# Altium PCB BEAGLEPLAYV020_220915.brd.PcbDoc (part 3 of 12)
Units mil, origin at the board's own origin, x right, y up, seen from the top; angles counter-clockwise.
Board outline 3149.7 x 3149.7 mil, 8 copper layers (TOP, LYR2_GND, LYR3, LAY4_PWR1, LAY5_PWR2, LAY6, LYR7_GND, BOTTOM), stack 60.84 mil thick; 782 components, 546 nets, 2864 pads, 2056 vias.
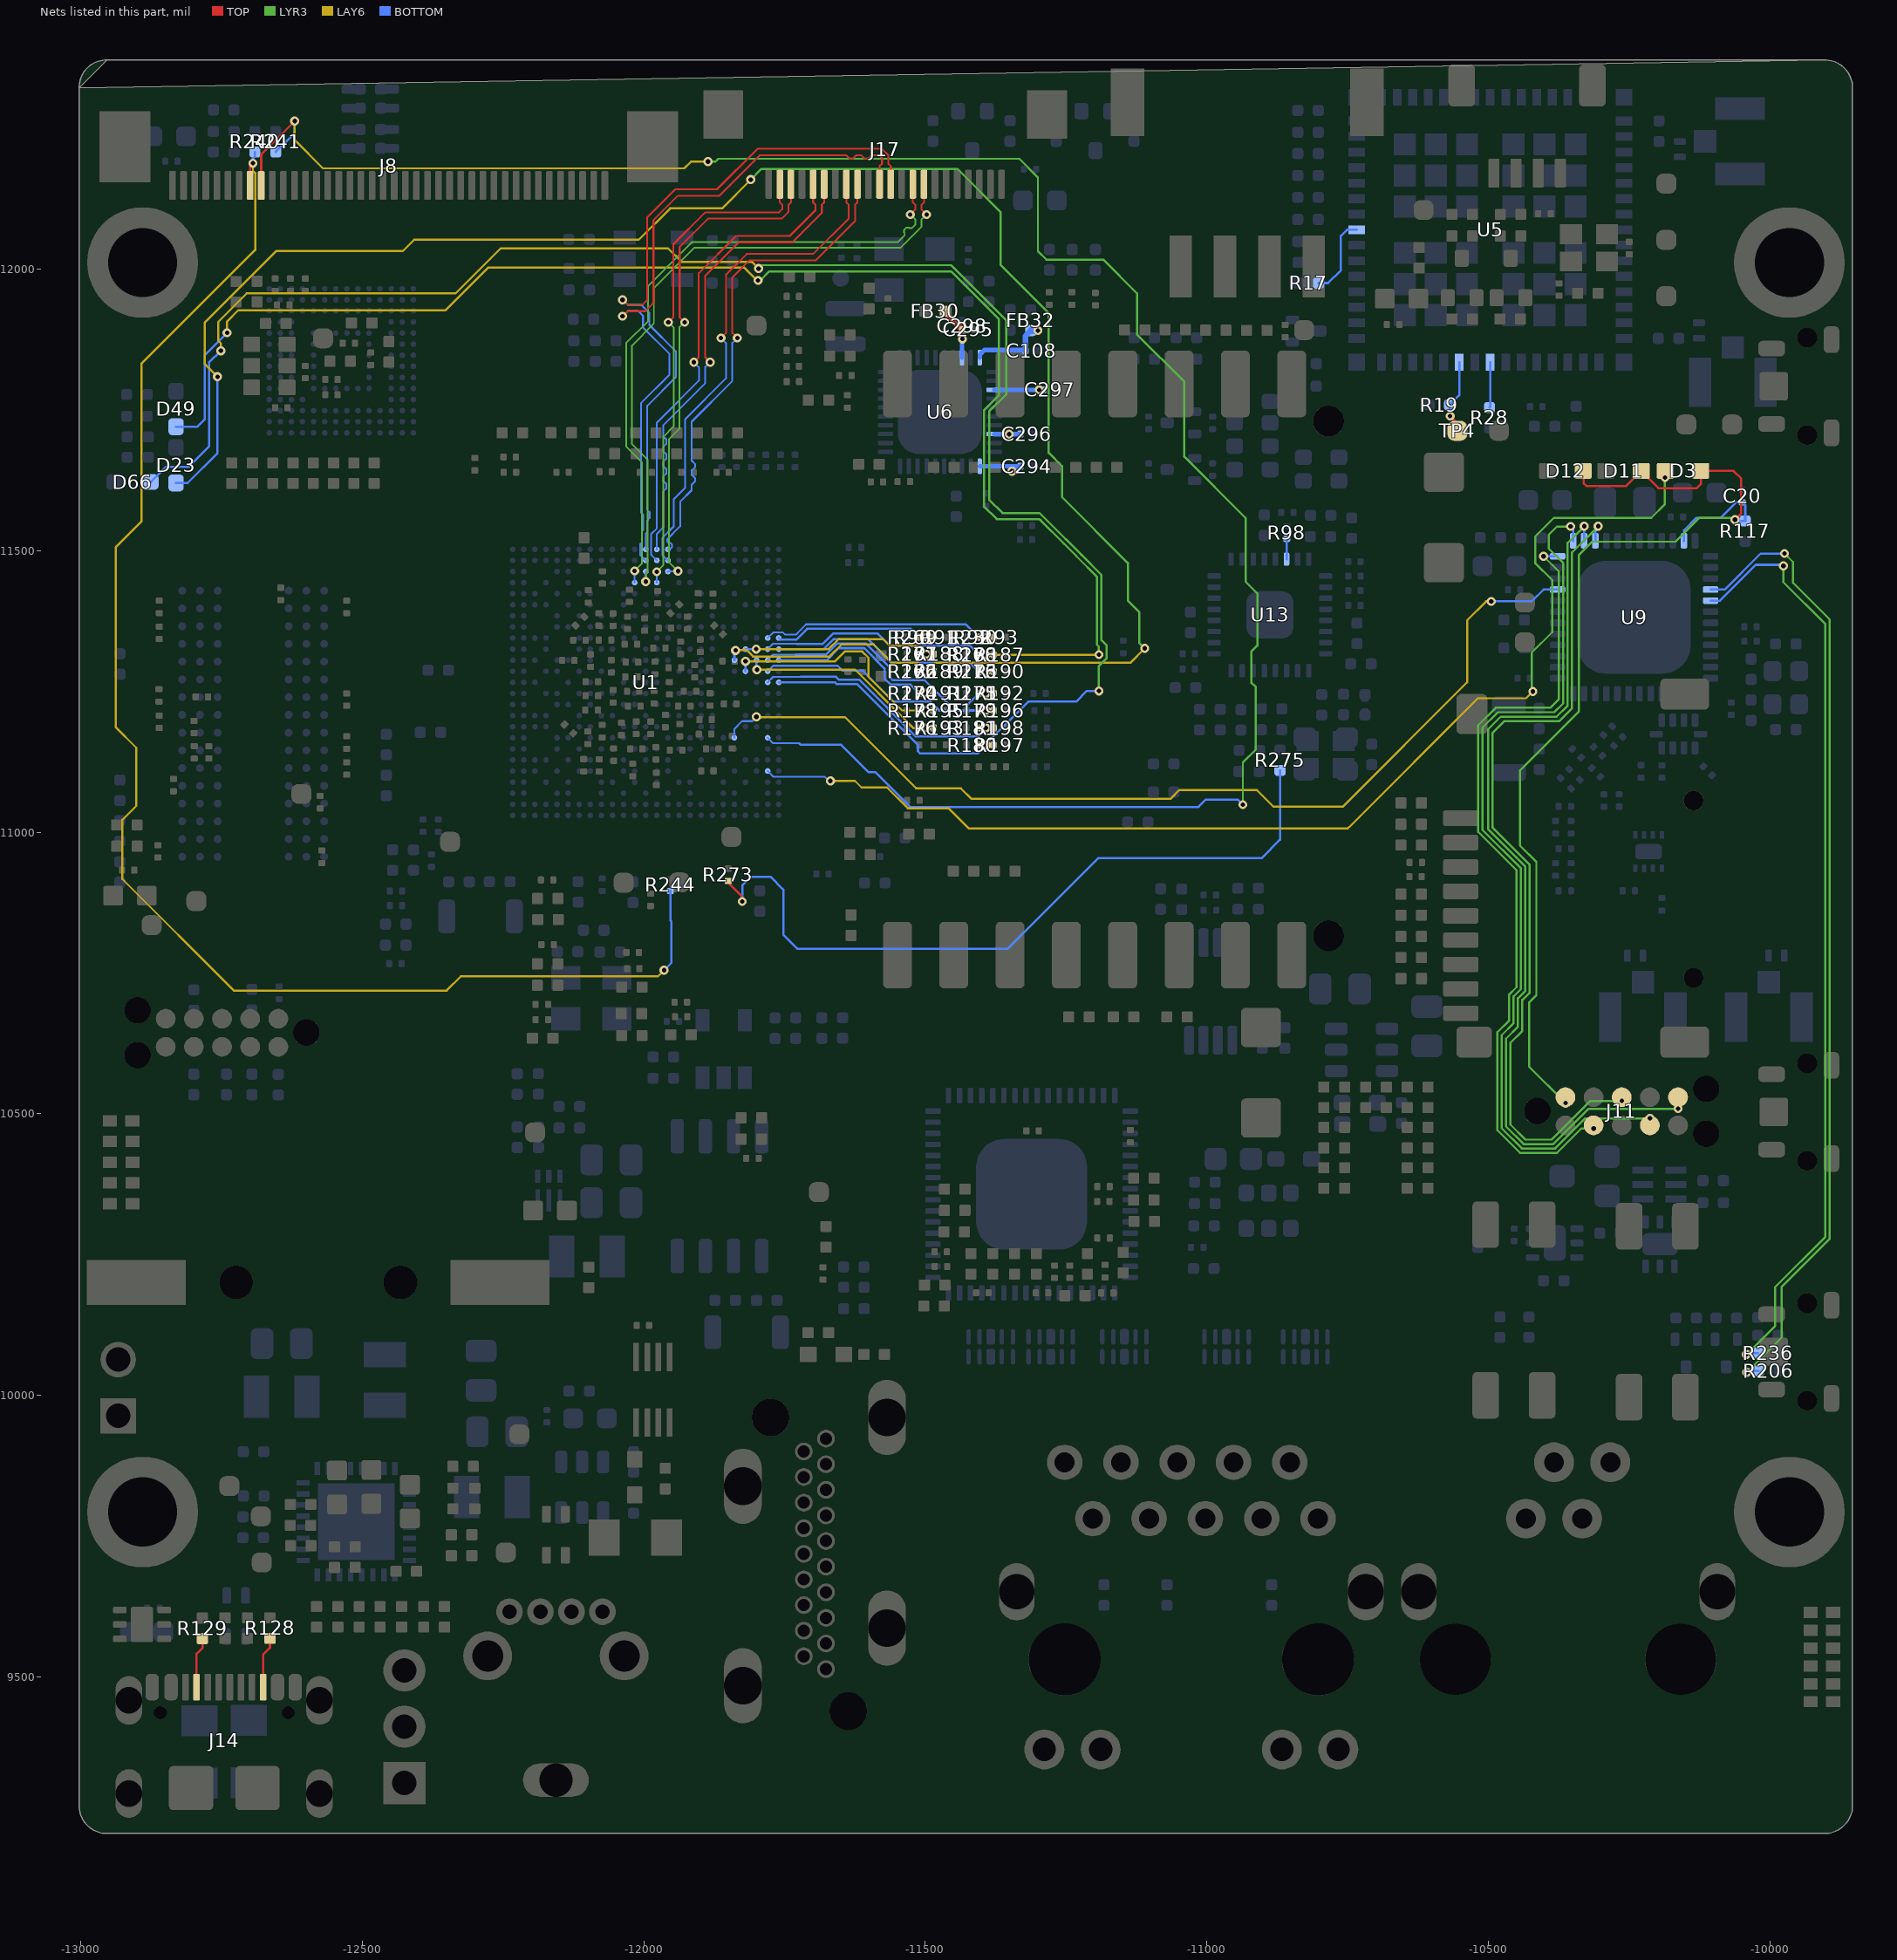
[diagram p9: the nets of this part, all layers, seen from the top]

## Footprints (in the part's own frame and the unit in brackets; to place one, negate y for a bottom-side part, rotate by r counter-clockwise, add the part's x,y. Pads: shape width x height; smd on the part's side, far side on the other; paste and mask are expansions set on the pad) (continued)
HDMI19P_1D155_23_1X7_7X16_4MM [mil] "HDMI19P_1D155_23_1X7_7X16_4MM"
  round 31.5 hole 21.65: 1(19.69,-45.2) 2(-19.69,-22.44) 3(19.69,0.28) 4(-19.69,23.03) 5(19.69,45.75) 6(-19.69,68.5) 7(19.69,91.22) 8(-19.69,113.98) 9(19.69,136.69) 10(-19.69,159.45) 11(19.69,182.17) 12(-19.69,204.92) 13(19.69,227.64) 14(-19.69,250.39) 15(19.69,273.11) 16(-19.69,295.87) 17(19.69,318.58) 18(-19.69,341.34) 19(19.69,364.06)
  oval 66.93x133.86 hole 66.93 slot 133.86 at 90 deg: 20(-127.95,-74.72) 21(-127.95,279.61) 22(127.95,27.64) 23(127.95,401.65)
  round 66.93 hole 66.93 unplated: ""(-78.74,401.65) ""(59.06,-120)
  Multi-Layer keep-out region: 102.29,-120 100.82,-108.81 96.5,-98.38 89.63,-89.43 80.67,-82.56 70.25,-78.24 59.06,-76.77 47.87,-78.24 37.44,-82.56 37.44,-82.56 28.48,-89.43 21.61,-98.38 17.29,-108.81 15.82,-120 17.29,-131.19 21.61,-141.62 28.48,-150.57 37.44,-157.44 37.44,-157.44 47.87,-161.76 59.06,-163.23 70.25,-161.76 80.67,-157.44 89.63,-150.57 96.5,-141.62 100.82,-131.19 102.29,-120
  Multi-Layer keep-out region: -35.5,401.65 -36.97,412.84 -41.29,423.27 -48.16,432.23 -57.12,439.1 -67.55,443.42 -78.74,444.89 -89.93,443.42 -100.36,439.1 -100.36,439.1 -109.32,432.23 -116.19,423.27 -120.51,412.84 -121.98,401.65 -120.51,390.46 -116.19,380.03 -109.32,371.08 -100.36,364.21 -100.36,364.21 -89.93,359.89 -78.74,358.41 -67.55,359.89 -57.12,364.21 -48.16,371.08 -41.29,380.03 -36.97,390.46 -35.5,401.65
  silkscreen extent -152,-455 152,455
HEADER2P_2D54_DIP [mil] "HEADER2P_2D54_DIP"
  rect 62.99x62.99 / inner round 62.99 / far side rect 62.99x62.99 hole 43.31: 1(0,50)
  round 62.99 hole 43.31: 2(0,-50)
  silkscreen extent -50,-100 50,100, body extent -50,-100 50,100, height 150
HEADER3P_2D54_DIP [mil] "HEADER3P_2D54_DIP"
  rect 75x75 hole 43.31: 1(0,100)
  round 75 hole 43.31: 2(0,0) 3(0,-100)
  silkscreen extent -50,-150 50,150, body extent -50,-150 50,150, height 150
JST4P_1D0_6_5X4_35X3_1MM [mil] "JST4P_1D0_6_5X4_35X3_1MM"
  rrect20% 19.68x51.18 smd: 1(-61.56,100) 2(-22.19,100) 3(17.19,100) 4(56.56,100)
  rrect33% 47.24x74.8 smd: 5(-118.64,-55.51) 6(113.64,-55.51)
  silkscreen extent -130,-85 125,145, body extent -128,-85 128,85, height 150
JST4P_SMD_2_0_90D [mil] "JST4P_SMD_2_0_90D"
  rect 40x110 smd: 1(-118.11,-182.5) 2(-39.37,-182.5) 3(39.37,-182.5) 4(118.11,-182.5)
  rect 60x120 smd: 5(212.6,108.84) 6(-212.6,108.84)
  silkscreen extent -240,-228 240,180
L4P_2D54_9_2X6X5MM [mil] "L4P_2D54_9_2X6X5MM"
  rrect33% 82.68x47.24 smd: 1(-151.57,50) 2(-151.57,-50) 3(151.57,-50) 4(151.57,50)
  silkscreen extent -200,-118 181,135, body extent -180,-120 180,120, height 150
L0201#1 [mil] "L0201"
  rrect50% 12.5x11 smd: 1(0.01,-11) 2(0.01,11.01)
  silkscreen extent -10,-20 10,20, body extent -15,-10 15,10, height 150
L0201#2 [mil] "L0201"
  rrect50% 12.5x11 smd: 1(-0.01,11) 2(-0.01,-11.01)
  silkscreen extent -10,-20 10,20, body extent -15,-10 15,10, height 150
L0201#3 [mil] "L0201"
  rrect50% 11x12.5 smd: 1(11,0) 2(-11,0)
  silkscreen extent -20,-10 20,10, body extent -15,-10 15,10, height 150
L0402#1 [mil] "L0402"
  rrect20% 19.68x19.68 smd: 1(-18.21,0) 2(18.21,0)
  silkscreen extent -33,-16 33,16, body extent -30,-15 30,15, height 150
L0402#2 [mil] "L0402"
  rrect50% 19.68x19.68 smd: 1(18.21,0) 2(-18.21,0)
  silkscreen extent -33,-16 33,16, body extent -30,-15 30,15, height 150
L0402#3 [mil] "L0402"
  rrect50% 19.68x19.68 smd: 1(-18.21,0) 2(18.21,0)
  silkscreen extent -33,-16 33,16, body extent -30,-15 30,15, height 150
L0805 [mil] "L0805"
  rrect50% 40x55 smd: 1(-35,0) 2(35,0)
  silkscreen extent -65,-35 65,35, body extent -65,-35 65,35, height 150
L1008#1 [mil] "L1008"
  rect 45x75 smd: 1(-45,0) 2(45,0)
  silkscreen extent -80,-50 80,50, body extent -80,-50 80,50, height 150
L1008#2 [mil] "L1008"
  rect 45x75 smd: 1(45,0) 2(-45,0)
  silkscreen extent -80,-50 80,50, body extent -80,-50 80,50, height 150
L2012#1 [mil] "L2012"
  rrect25% 29.52x15.74 smd: 1(-36.42,16.73) 2(36.42,16.73) 3(36.42,-16.73) 4(-36.42,-16.73)
  silkscreen extent -40,-24 39,45, body extent -40,-25 40,25, height 150
L2012#2 [mil] "L2012"
  rrect50% 29.52x15.74 smd: 1(36.42,-16.73) 2(-36.42,-16.73) 3(-36.42,16.73) 4(36.42,16.73)
  silkscreen extent -39,-45 40,24, body extent -40,-25 40,25, height 150
L2012#3 [mil] "L2012"
  rrect50% 29.52x15.74 smd: 1(-36.42,16.73) 2(36.42,16.73) 3(36.42,-16.73) 4(-36.42,-16.73)
  silkscreen extent -40,-24 39,45, body extent -40,-25 40,25, height 150
L2016 [mil] "L2016"
  rrect50% 27.56x70.86 smd: 1(31.5,0) 2(-31.5,0)
  silkscreen extent -50,-40 50,40
LED0402 [mil] "LED0402"
  rect 25x20 smd: 1(-20,0) 2(20,0)
  TOP keep-out region: -4,-12 -4,12 4,12 4,-12
  silkscreen extent -65,-15 40,15, body extent -40,-15 40,15, height 150
MICRO_SD_ST_TF_003A_16_1X14_5MM [mil] "MICRO_SD_ST_TF_003A_16_1X14_5MM"
  rrect29% 62.98x27.56 smd: 1(-295,91.08) 2(-295,47.78) 3(-295,4.47) 4(-295,-38.84) 5(-295,-82.15) 6(-295,-125.45) 7(-295,-168.76) 8(-295,-212.07) 9(-295,-255.37)
  rrect29% 62.98x55.12 smd: 10(-271.38,-306.56)
  rrect29% 86.6x55.12 smd: 11(102.64,-306.56) 12(102.64,311.56)
  rrect29% 55.12x70.86 smd: 13(-275.31,276.12)
  round 35.43 hole 35.43 unplated: ""(118.39,-192.38) ""(118.39,122.58)
  Multi-Layer keep-out region: 146.34,-192.38 145.39,-185.15 142.59,-178.41 138.15,-172.62 132.36,-168.17 125.62,-165.38 118.39,-164.43 111.15,-165.38 104.41,-168.17 104.41,-168.17 98.62,-172.62 94.18,-178.41 91.39,-185.15 90.43,-192.38 91.39,-199.62 94.18,-206.36 98.62,-212.15 104.41,-216.59 104.41,-216.59 111.15,-219.38 118.39,-220.34 125.62,-219.38 132.36,-216.59 138.15,-212.15 142.59,-206.36 145.39,-199.62 146.34,-192.38
  Multi-Layer keep-out region: 146.34,122.58 145.39,129.81 142.59,136.56 138.15,142.34 132.36,146.79 125.62,149.58 118.39,150.53 111.15,149.58 104.41,146.79 104.41,146.79 98.62,142.34 94.18,136.56 91.39,129.81 90.43,122.58 91.39,115.34 94.18,108.6 98.62,102.81 104.41,98.37 104.41,98.37 111.15,95.58 118.39,94.63 125.62,95.58 132.36,98.37 138.15,102.81 142.59,108.6 145.39,115.34 146.34,122.58
  silkscreen extent -295,-295 398,292
MIKROBUS16_2D54_25_4X22_88X8_5MM [mil] "MIKROBUS16_2D54_25_4X22_88X8_5MM"
  rrect31% 51.18x118.1 smd: 1(-315,-507.09) 2(-215,-507.09) 3(-115,-507.09) 4(-15,-507.09) 5(85,-507.09) 6(185,-507.09) 7(285,-507.09) 8(385,-507.09) 9(385,507.09) 10(285,507.09) 11(185,507.09) 12(85,507.09) 13(-15,507.09) 14(-115,507.09) 15(-215,507.09) 16(-315,507.09)
  round 55.12 hole 55.12 unplated: ""(-380.35,472.44) ""(-380.35,-440.94)
  Multi-Layer keep-out region: -415.52,-440.94 -414.32,-450.05 -410.81,-458.53 -405.22,-465.81 -397.94,-471.4 -389.46,-474.91 -380.35,-476.11 -371.25,-474.91 -362.77,-471.4 -362.77,-471.4 -355.49,-465.81 -349.9,-458.53 -346.39,-450.05 -345.19,-440.94 -346.39,-431.84 -349.9,-423.36 -355.49,-416.08 -362.77,-410.49 -362.77,-410.49 -371.25,-406.98 -380.35,-405.78 -389.46,-406.98 -397.94,-410.49 -405.22,-416.08 -410.81,-423.36 -414.32,-431.84 -415.52,-440.94
  Multi-Layer keep-out region: -415.52,472.44 -414.32,463.34 -410.81,454.86 -405.22,447.57 -397.94,441.99 -389.46,438.47 -380.35,437.27 -371.25,438.47 -362.77,441.99 -362.77,441.99 -355.49,447.57 -349.9,454.86 -346.39,463.34 -345.19,472.44 -346.39,481.54 -349.9,490.02 -355.49,497.31 -362.77,502.9 -362.77,502.9 -371.25,506.41 -380.35,507.61 -389.46,506.41 -397.94,502.9 -405.22,497.31 -410.81,490.02 -414.32,481.54 -415.52,472.44
  silkscreen extent -466,-500 435,500, body extent -485,-500 485,500, height 150
PTH_3_125MM_5 [mm] "PTH_3_125MM_5"
  round 5 hole 3.125: 1(0,0)
QFN32_5X5MM_TPS65219 [mil] "QFN32_5X5MM_TPS65219"
  rect 23.62x9.84 smd: 1(-94.49,68.9) 2(-94.49,49.21) 3(-94.49,29.53) 4(-94.49,9.84) 5(-94.49,-9.84) 6(-94.49,-29.53) 7(-94.49,-49.21) 8(-94.49,-68.9) 17(94.49,-68.9) 18(94.49,-49.21) 19(94.49,-29.53) 20(94.49,-9.84) 21(94.49,9.84) 22(94.49,29.53) 23(94.49,49.21) 24(94.49,68.9)
  rect 9.84x23.62 smd: 9(-68.9,-94.49) 10(-49.21,-94.49) 11(-29.53,-94.49) 12(-9.84,-94.49) 13(9.84,-94.49) 14(29.53,-94.49) 15(49.21,-94.49) 16(68.9,-94.49) 25(68.9,94.49) 26(49.21,94.49) 27(29.53,94.49) 28(9.84,94.49) 29(-9.84,94.49) 30(-29.53,94.49) 31(-49.21,94.49) 32(-68.9,94.49)
  rect 135.83x135.83 smd: 33(0,0)
  silkscreen extent -125,-107 107,125, body extent -100,-100 100,100, height 150
QFN40_0D4_5X5MM [mm] "QFN40_0D4_5X5MM"
  rrect50% 0.7x0.2 smd: 1(-2.45,1.8) 2(-2.45,1.4) 3(-2.45,1) 4(-2.45,0.6) 5(-2.45,0.2) 6(-2.45,-0.2) 7(-2.45,-0.6) 8(-2.45,-1) 9(-2.45,-1.4) 10(-2.45,-1.8) 21(2.45,-1.8) 22(2.45,-1.4) 23(2.45,-1) 24(2.45,-0.6) 25(2.45,-0.2) 26(2.45,0.2) 27(2.45,0.6) 28(2.45,1) 29(2.45,1.4) 30(2.45,1.8)
  rrect50% 0.2x0.7 smd: 11(-1.8,-2.45) 12(-1.4,-2.45) 13(-1,-2.45) 14(-0.6,-2.45) 15(-0.2,-2.45) 16(0.2,-2.45) 17(0.6,-2.45) 18(1,-2.45) 19(1.4,-2.45) 20(1.8,-2.45) 31(1.8,2.45) 32(1.4,2.45) 33(1,2.45) 34(0.6,2.45) 35(0.2,2.45) 36(-0.2,2.45) 37(-0.6,2.45) 38(-1,2.45) 39(-1.4,2.45) 40(-1.8,2.45)
  rrect50% 3.8x3.8 smd: 41(0,0)
  silkscreen extent -2.92,-2.5 2.5,2.92, body extent -2.54,-2.54 2.54,2.54, height 3.81
QFN48_0D5_7X7MM [mil] "QFN48_0D5_7X7MM"
  rrect50% 27.56x11.8 smd: 1(135.83,-108.27) 2(135.83,-88.58) 3(135.83,-68.9) 4(135.83,-49.21) 5(135.83,-29.53) 6(135.83,-9.84) 7(135.83,9.84) 8(135.83,29.53) 9(135.83,49.21) 10(135.83,68.9) 11(135.83,88.58) 12(135.83,108.27) 25(-135.83,108.27) 26(-135.83,88.58) 27(-135.83,68.9) 28(-135.83,49.21) 29(-135.83,29.53) 30(-135.83,9.84) 31(-135.83,-9.84) 32(-135.83,-29.53) 33(-135.83,-49.21) 34(-135.83,-68.9) 35(-135.83,-88.58) 36(-135.83,-108.27)
  rrect50% 11.8x27.56 smd: 13(108.27,135.83) 14(88.58,135.83) 15(68.9,135.83) 16(49.21,135.83) 17(29.53,135.83) 18(9.84,135.83) 19(-9.84,135.83) 20(-29.53,135.83) 21(-49.21,135.83) 22(-68.9,135.83) 23(-88.58,135.83) 24(-108.27,135.83) 37(-108.27,-135.83) 38(-88.58,-135.83) 39(-68.9,-135.83) 40(-49.21,-135.83) 41(-29.53,-135.83) 42(-9.84,-135.83) 43(9.84,-135.83) 44(29.53,-135.83) 45(49.21,-135.83) 46(68.9,-135.83) 47(88.58,-135.83) 48(108.27,-135.83)
  rrect50% 200.78x200.78 smd: 49(0,0)
  silkscreen extent -138,-155 155,138
QFN64_0D5_9X9MM [mil] "QFN64_0D5_9X9MM"
  rrect50% 27.56x9.84 smd: 1(-175.2,147.64) 2(-175.2,127.95) 3(-175.2,108.27) 4(-175.2,88.58) 5(-175.2,68.9) 6(-175.2,49.21) 7(-175.2,29.53) 8(-175.2,9.84) 9(-175.2,-9.84) 10(-175.2,-29.53) 11(-175.2,-49.21) 12(-175.2,-68.9) 13(-175.2,-88.58) 14(-175.2,-108.27) 15(-175.2,-127.95) 16(-175.2,-147.64) 33(175.2,-147.64) 34(175.2,-127.95) 35(175.2,-108.27) 36(175.2,-88.58) 37(175.2,-68.9) 38(175.2,-49.21) 39(175.2,-29.53) 40(175.2,-9.84) 41(175.2,9.84) 42(175.2,29.53) 43(175.2,49.21) 44(175.2,68.9) 45(175.2,88.58) 46(175.2,108.27) 47(175.2,127.95) 48(175.2,147.64)
  rrect50% 9.84x27.56 smd: 17(-147.64,-175.2) 18(-127.95,-175.2) 19(-108.27,-175.2) 20(-88.58,-175.2) 21(-68.9,-175.2) 22(-49.21,-175.2) 23(-29.53,-175.2) 24(-9.84,-175.2) 25(9.84,-175.2) 26(29.53,-175.2) 27(49.21,-175.2) 28(68.9,-175.2) 29(88.58,-175.2) 30(108.27,-175.2) 31(127.95,-175.2) 32(147.64,-175.2) 49(147.64,175.2) 50(127.95,175.2) 51(108.27,175.2) 52(88.58,175.2) 53(68.9,175.2) 54(49.21,175.2) 55(29.53,175.2) 56(9.84,175.2) 57(-9.84,175.2) 58(-29.53,175.2) 59(-49.21,175.2) 60(-68.9,175.2) 61(-88.58,175.2) 62(-108.27,175.2) 63(-127.95,175.2) 64(-147.64,175.2)
  rrect50% 196.84x196.84 smd: 65(0,0)
  silkscreen extent -195,-177 177,195, body extent -180,-180 180,180, height 150
R0201#1 [mil] "R0201"
  rrect36% 11x12.5 smd: 1(-11,0) 2(11,0)
  silkscreen extent -20,-10 20,10, body extent -15,-10 15,10, height 150
R0201#2 [mil] "R0201"
  rrect50% 11x12.5 smd: 1(11,0) 2(-11,0)
  silkscreen extent -20,-10 20,10, body extent -15,-10 15,10, height 150
R0201#3 [mil] "R0201"
  rrect50% 11x12.5 smd: 1(-11,0) 2(11,0)
  silkscreen extent -20,-10 20,10, body extent -15,-10 15,10, height 150
R0402#1 [mil] "R0402"
  rrect50% 19.68x19.68 smd: 1(18.21,0) 2(-18.21,0)
  silkscreen extent -33,-16 33,16
R0402#2 [mil] "R0402"
  rrect20% 19.68x19.68 smd: 1(-18.21,0) 2(18.21,0)
  silkscreen extent -33,-16 33,16, body extent -30,-15 30,15, height 150
R0402#3 [mil] "R0402"
  rrect50% 19.68x19.68 smd: 1(-18.21,0) 2(18.21,0)
  silkscreen extent -33,-16 33,16, body extent -30,-15 30,15, height 150
R1206 [mil] "R1206"
  rect 55x64 smd: 1(55.5,0) 2(-55.5,0)
  silkscreen extent -85,-40 85,40, body extent -85,-40 85,40, height 150
RJ11_6P4C_1D27_21_15X13_8X13_3 [mm] "RJ11_6P4C_1D27_21_15X13_8X13_3"
  round 1.8 hole 0.9: 2(-1.905,6.575) 3(-0.635,9.115) 4(0.635,6.575) 5(1.905,9.115)
  oval 1.6x2.6 hole 1.6 slot 2.6 at 90 deg: S1(-6.73,3.275) S2(6.73,3.275)
  round 3.2 hole 3.2 unplated: ""(-5.08,0.225) ""(5.08,0.225)
  Multi-Layer keep-out region: -3.221,0.225 -3.257,0.588 -3.363,0.936 -3.534,1.258 -3.766,1.539 -4.047,1.771 -4.369,1.942 -4.717,2.048 -5.08,2.084 -5.443,2.048 -5.791,1.942 -6.005,1.828 -6.005,1.828 -6.113,1.771 -6.394,1.539 -6.626,1.258 -6.797,0.936 -6.903,0.588 -6.939,0.225 -6.903,-0.138 -6.797,-0.486 -6.626,-0.808 -6.394,-1.089 -6.113,-1.321 -6.005,-1.378 -6.005,-1.378 -5.791,-1.492 -5.443,-1.598 -5.08,-1.634 -4.717,-1.598 -4.369,-1.492 -4.047,-1.321 -3.766,-1.089 -3.534,-0.808 -3.363,-0.486 -3.257,-0.138 -3.221,0.225
  Multi-Layer keep-out region: 6.939,0.225 6.903,0.588 6.797,0.936 6.626,1.258 6.394,1.539 6.113,1.771 5.791,1.942 5.443,2.048 5.08,2.084 4.717,2.048 4.369,1.942 4.155,1.828 4.155,1.828 4.047,1.771 3.766,1.539 3.534,1.258 3.363,0.936 3.257,0.588 3.221,0.225 3.257,-0.138 3.363,-0.486 3.534,-0.808 3.766,-1.089 4.047,-1.321 4.155,-1.378 4.155,-1.378 4.369,-1.492 4.717,-1.598 5.08,-1.634 5.443,-1.598 5.791,-1.492 6.113,-1.321 6.394,-1.089 6.626,-0.808 6.797,-0.486 6.903,-0.138 6.939,0.225
  silkscreen extent -7,-10.67 7,10.68, body extent -6.9,-10.58 6.9,10.58, height 3.81
RJ45_18P_21_23X15_93X13_3MM [mil] "RJ45_18P_21_23X15_93X13_3MM"
  round 62.99 hole 35.43: 1(-225,357.5) 2(-175,257.5) 3(-125,357.5) 4(-75,257.5) 5(-25,357.5) 6(25,257.5) 7(75,357.5) 8(125,257.5) 9(175,357.5) 10(225,257.5)
  round 70.87 hole 41.34: 11(-261.02,-152.34) 12(-161.02,-152.34) 13(161.02,-152.34) 14(261.02,-152.34)
  oval 62.99x102.36 hole 62.99 slot 102.36 at 90 deg: 15(-310.04,127.58) 16(310.04,127.58)
  round 127.95 hole 127.95 unplated: ""(-225,7.5) ""(225,7.5)
  Multi-Layer keep-out region: 300.53,7.5 299.08,22.24 294.78,36.41 287.8,49.46 278.41,60.91 266.96,70.3 253.91,77.28 239.74,81.58 225,83.03 210.26,81.58 196.09,77.28 187.39,72.63 187.39,72.63 183.04,70.3 171.59,60.91 162.2,49.46 155.22,36.41 150.92,22.24 149.47,7.5 150.92,-7.24 155.22,-21.41 162.2,-34.46 171.59,-45.91 183.04,-55.3 187.39,-57.63 187.39,-57.63 196.09,-62.28 210.26,-66.58 225,-68.03 239.74,-66.58 253.91,-62.28 266.96,-55.3 278.41,-45.91 287.8,-34.46 294.78,-21.41 299.08,-7.24 300.53,7.5
  Multi-Layer keep-out region: -150.31,7.5 -151.75,22.07 -156,36.08 -162.9,49 -172.19,60.31 -183.5,69.6 -196.42,76.5 -210.43,80.75 -225,82.19 -239.57,80.75 -253.58,76.5 -262.18,71.91 -262.18,71.91 -266.5,69.6 -277.81,60.31 -287.1,49 -294,36.08 -298.25,22.07 -299.69,7.5 -298.25,-7.07 -294,-21.08 -287.1,-34 -277.81,-45.31 -266.5,-54.6 -262.18,-56.91 -262.18,-56.91 -253.58,-61.5 -239.57,-65.75 -225,-67.19 -210.43,-65.75 -196.42,-61.5 -183.5,-54.6 -172.19,-45.31 -162.9,-34 -156,-21.08 -151.75,-7.07 -150.31,7.5
  silkscreen extent -314,-418 314,452
SMINI6-F3-B [mil] "SMINI6-F3-B"
  rect 12x37.4 smd: 1(-25.59,-29.53) 2(0,-29.53) 3(25.59,-29.53) 4(25.59,29.53) 5(0,29.53) 6(-25.59,29.53)
  silkscreen extent -55,-40 39,25, body extent -40,-25 40,25, height 150
SOD_523#1 [mil] "SOD_523"
  rrect14% 30x27.56 smd: 1(-31.5,0) 2(31.5,0)
  silkscreen extent -14,-16 14,16, body extent -25,-15 25,15, height 150
SOD_523#2 [mil] "SOD_523"
  rrect50% 30x27.56 smd: 1(31.5,0) 2(-31.5,0)
  silkscreen extent -14,-16 14,16
SOD_523#3 [mil] "SOD_523"
  rrect50% 30x27.56 smd: 1(-31.5,0) 2(31.5,0)
  silkscreen extent -14,-16 14,16, body extent -25,-15 25,15, height 150
SOIC8_1D27_4_9X3_9MM [mm] "SOIC8_1D27_4_9X3_9MM"
  rrect50% 0.6x1.55 smd: 1(-1.905,-2.7) 2(-0.635,-2.7) 3(0.635,-2.7) 4(1.905,-2.7) 5(1.905,2.7) 6(0.635,2.7) 7(-0.635,2.7) 8(-1.905,2.7)
  silkscreen extent -2.79,-2.29 2.45,1.95, body extent -2.41,-1.91 2.41,1.91, height 3.81
SON8P_150X150X50MM [mm] "SON8P_150X150X50MM"
  rrect50% 0.2x0.35 smd: 1(-0.59,-0.765) 2(-0.19,-0.765) 3(0.21,-0.765) 4(0.61,-0.765) 5(0.61,0.735) 6(0.21,0.735) 7(-0.19,0.735) 8(-0.59,0.735)
  rrect50% 1.2x0.7 smd: 9(0.01,-0.015)
  silkscreen extent -1.35,-0.89 0.91,0.43, body extent -0.91,-0.95 0.91,0.94, height 3.81
SOT23 [mil] "SOT23"
  rrect50% 40x45 smd: 1(35,42.5) 2(-35,42.5) 3(0,-37.5)
  silkscreen extent -58,-23 58,13, body extent -55,-23 55,23, height 150
SOT23-5#1 [mil] "SOT23-5"
  rect 25x40 smd: 1(37.5,51) 2(0,51) 3(-37.5,51) 4(-37.5,-51) 5(37.5,-51)
  silkscreen extent -56,-30 56,90
SOT23-5#2 [mil] "SOT23-5"
  rect 25x40 smd: 1(-37.5,-51) 2(0,-51) 3(37.5,-51) 4(37.5,51) 5(-37.5,51)
  silkscreen extent -56,-90 56,30, body extent -55,-30 55,30, height 150
SOT23_6#1 [mil] "SOT23_6"
  rrect50% 21.64x40 smd: 1(-37.4,-45) 2(0,-45) 3(37.4,-45) 4(37.4,45) 5(0,45) 6(-37.4,45)
  silkscreen extent -70,-45 57,31, body extent -55,-30 55,30, height 150
SOT23_6#2 [mil] "SOT23_6"
  rrect50% 21.64x40 smd: 1(37.4,45) 2(0,45) 3(-37.4,45) 4(-37.4,-45) 5(0,-45) 6(37.4,-45)
  silkscreen extent -57,-31 70,45, body extent -55,-30 55,30, height 150
SOT-323-3#1 [mil] "SOT-323-3"
  rrect32% 25x30 smd: 1(-25,-35) 2(26.18,-35) 3(0,35)
  silkscreen extent -40,-25 40,25
SOT-323-3#2 [mil] "SOT-323-3"
  rrect50% 25x30 smd: 1(-25,-35) 2(26.18,-35) 3(0,35)
  silkscreen extent -40,-25 40,25, body extent -40,-25 40,25, height 150
SOT_523#1 [mm] "SOT_523"
  rrect50% 0.4x0.6 smd: 1(0.5,0.62) 2(-0.5,0.62)
  rrect50% 0.5x0.6 smd: 3(0,-0.62)
  silkscreen extent -0.8,-0.4 0.8,0.4, body extent -0.76,-0.76 0.76,0.76, height 3.81
SOT_523#2 [mm] "SOT_523"
  rrect50% 0.4x0.6 smd: 1(-0.5,-0.62) 2(0.5,-0.62)
  rrect50% 0.5x0.6 smd: 3(0,0.62)
  silkscreen extent -0.8,-0.4 0.8,0.4, body extent -0.76,-0.76 0.76,0.76, height 3.81
TP30C_SMD [mil] "TP30C_SMD"
  round 30 smd: 1(0,0)
  body extent -16,-16 16,16, height 150
TP35S_SMD [mil] "TP35S_SMD"
  rrect67% 35.42x35.42 smd: 1(0,0)
  body extent -18,-18 18,18, height 150
U-FL3P-SMD-2_6X2_6X1_0MM#1 [mil] "U-FL3P-SMD-2_6X2_6X1_0MM"
  rect 40x40 smd: 1(52.01,0)
  rect 88x40 smd: 2(-10,58.07) 3(-10,-58.07)
  TOP keep-out region: -59,38 -59,-38 40,-38 40,38
  TOP keep-out region: -54.09,77.95 -54.09,38.19 34.09,38.19 34.09,77.95
  TOP keep-out region: -54.09,-38.19 -54.09,-77.95 34.09,-77.95 34.09,-38.19
  TOP keep-out region: 32.13,20.08 32.13,-20.08 71.89,-20.08 71.89,20.08
  silkscreen extent -73,-51 41,51, body extent -80,-85 80,85, height 150
U-FL3P-SMD-2_6X2_6X1_0MM#2 [mil] "U-FL3P-SMD-2_6X2_6X1_0MM"
  rect 40x40 smd: 1(-52.01,0)
  rect 88x40 smd: 2(10,-58.07) 3(10,58.07)
  TOP keep-out region: 59,-38 59,38 -40,38 -40,-38
  TOP keep-out region: 54.09,-77.95 54.09,-38.19 -34.09,-38.19 -34.09,-77.95
  TOP keep-out region: 54.09,38.19 54.09,77.95 -34.09,77.95 -34.09,38.19
  TOP keep-out region: -32.13,-20.08 -32.13,20.08 -71.89,20.08 -71.89,-20.08
  silkscreen extent -41,-51 73,51, body extent -80,-85 80,85, height 150
U_8_DCU [mil] "U_8_DCU"
  rect 10x50 smd: 1(-29.5,-58) 2(-9.8,-58) 3(9.8,-58) 4(29.5,-58) 5(29.5,58) 6(9.8,58) 7(-9.8,58) 8(-29.5,58)
  silkscreen extent -60,-65 42,48
USB2_0_TYPE_C [mm] "USB2_0_TYPE_C"
  rrect33% 1.2x0.3 smd: A5(3.733,1.313) A6(3.733,0.313) A7(3.733,-0.186) A8(3.733,-1.186) B5(3.733,-1.687) B6(3.733,-0.687) B7(3.733,0.814) B8(3.733,1.814)
  rrect67% 1.2x0.6 smd: B1(3.733,-3.136) B4(3.733,-2.337) B9(3.733,2.464) B12(3.733,3.313)
  oval 2.2x1.2 hole 1.2 slot 2.2 at 0 deg: S1(-1.067,4.363) S2(3.133,4.363) S3(-1.067,-4.236) S4(3.133,-4.236)
  rrect20% 2x2 smd: S5(-0.817,1.564) S6(-0.817,-1.437)
  round 0.6 hole 0.6 unplated: ""(2.583,2.954) ""(2.583,-2.827)
  Multi-Layer keep-out region: 2.583,-3.336 2.778,-3.298 2.944,-3.187 3.054,-3.022 3.093,-2.826 3.054,-2.631 3.017,-2.576 3.017,-2.576 2.944,-2.466 2.778,-2.355 2.583,-2.317 2.388,-2.355 2.222,-2.466 2.149,-2.576 2.149,-2.576 2.112,-2.631 2.073,-2.826 2.112,-3.022 2.222,-3.187 2.388,-3.298 2.583,-3.336
  Multi-Layer keep-out region: 2.583,2.444 2.778,2.482 2.944,2.593 3.054,2.758 3.093,2.953 3.054,3.149 3.017,3.204 3.017,3.204 2.944,3.314 2.778,3.425 2.583,3.463 2.388,3.425 2.222,3.314 2.149,3.204 2.149,3.204 2.112,3.149 2.073,2.953 2.112,2.758 2.222,2.593 2.388,2.482 2.583,2.444
  silkscreen extent -4.67,-6.19 1.78,6.31, body extent -3.68,-4.51 3.68,4.51, height 3.81
USB7P_1R4_14X5R72MM [mm] "USB7P_1R4_14X5R72MM"
  round 1.2 hole 0.65: 1(6.032,-2.1) 2(6.032,-0.7) 3(6.032,0.7) 4(6.032,2.1)
  round 2.2 hole 1.4: 5(4.033,-3.08) 6(4.033,3.08)
  oval 1.5x2.972 hole 1.5 slot 2.972 at 90 deg: 7(-1.567,0)
  silkscreen extent -6.97,-2.85 7.03,2.85, body extent -6.92,-2.79 6.92,2.79, height 3.81
USON10_0D5_2D5X1X0D5MM [mm] "USON10_0D5_2D5X1X0D5MM"
  oval 0.2x0.7 smd: 1(-1,-0.45) 2(-0.5,-0.45) 4(0.5,-0.45) 5(1,-0.45) 6(1,0.45) 7(0.5,0.45) 9(-0.5,0.45) 10(-1,0.45)
  rrect50% 0.4x0.7 smd: 3(0,-0.45) 8(0,0.45)
  silkscreen extent -1.65,-0.89 1.25,0.5, body extent -1.27,-0.51 1.27,0.51, height 3.81
VQFN32_0D5_5X5MM [mil] "VQFN32_0D5_5X5MM"
  rrect50% 9.84x23.62 smd: 1(68.95,99) 2(49.25,99) 3(29.55,99) 4(9.85,99) 5(-9.85,99) 6(-29.55,99) 7(-49.25,99) 8(-68.95,99) 17(-68.95,-99) 18(-49.25,-99) 19(-29.55,-99) 20(-9.85,-99) 21(9.85,-99) 22(29.55,-99) 23(49.25,-99) 24(68.95,-99)
  rrect50% 23.62x9.84 smd: 9(-99,68.95) 10(-99,49.25) 11(-99,29.55) 12(-99,9.85) 13(-99,-9.85) 14(-99,-29.55) 15(-99,-49.25) 16(-99,-68.95) 25(99,-68.95) 26(99,-49.25) 27(99,-29.55) 28(99,-9.85) 29(99,9.85) 30(99,29.55) 31(99,49.25) 32(99,68.95)
  rrect50% 84.24x84.24 smd: 33(0,0)
  silkscreen extent -101,-101 115,120, body extent -100,-100 100,100, height 150
VSON6_0D5_1D5X1D5X1MM [mil] "VSON6_0D5_1D5X1D5X1MM"
  rrect50% 23.62x9.84 smd: 1(20.81,-11.47) 2(20.81,8.22) 3(20.81,27.91)
  rect 39.37x7.87 smd: 4(-22.5,27.91) 5(-22.5,8.22) 6(-22.5,-11.47)
  silkscreen extent -35,-37 40,38, body extent -44,-41 44,41, height 150
VSSOP8_0D65_3X3X1_1MM [mil] "VSSOP8_0D65_3X3X1_1MM"
  rrect50% 17.72x51.18 smd: 1(-38.39,-86.61) 2(-12.8,-86.61) 3(12.8,-86.61) 4(38.39,-86.61) 5(38.39,86.61) 6(12.8,86.61) 7(-12.8,86.61) 8(-38.39,86.61)
  silkscreen extent -80,-80 60,55, body extent -60,-60 60,60, height 150
WSON6_0D65_2X2X0_8MM#1 [mm] "WSON6_0D65_2X2X0_8MM"
  rrect33% 0.6x0.3 smd: 1(-1,0.65) 2(-1,0) 3(-1,-0.65) 4(1,-0.65) 5(1,0) 6(1,0.65)
  rrect20% 1x1.6 smd: 7(0,0)
  silkscreen extent -1.4,-1 1,1.4
WSON6_0D65_2X2X0_8MM#2 [mm] "WSON6_0D65_2X2X0_8MM"
  rrect50% 0.6x0.3 smd: 1(1,-0.65) 2(1,0) 3(1,0.65) 4(-1,0.65) 5(-1,0) 6(-1,-0.65)
  rrect50% 1x1.6 smd: 7(0,0)
  silkscreen extent -1,-1.4 1.4,1
WSON6_0D65_2X2X0_8MM#3 [mm] "WSON6_0D65_2X2X0_8MM"
  rrect50% 0.6x0.3 smd: 1(-1,0.65) 2(-1,0) 3(-1,-0.65) 4(1,-0.65) 5(1,0) 6(1,0.65)
  rrect50% 1x1.6 smd: 7(0,0)
  silkscreen extent -1.4,-1 1,1.4, body extent -1.02,-1.02 1.02,1.02, height 3.81
X1SON2_0D65_1X0_6X0_45MM#1 [mm] "X1SON2_0D65_1X0_6X0_45MM"
  rrect50% 0.3x0.55 smd: 1(-0.35,0) 2(0.35,0)
  silkscreen extent -0.13,-0.3 0.13,0.3, body extent -0.38,-0.38 0.38,0.38, height 3.81
X1SON2_0D65_1X0_6X0_45MM#2 [mm] "X1SON2_0D65_1X0_6X0_45MM"
  rrect50% 0.3x0.55 smd: 1(0.35,0) 2(-0.35,0)
  silkscreen extent -0.13,-0.3 0.13,0.3
X2_SMD_3_2X1_5MM#1 [mil] "X2_SMD_3_2X1_5MM"
  rrect50% 30x60 smd: 1(60,0) 2(-60,0)
  silkscreen extent -35,-30 35,30
X2_SMD_3_2X1_5MM#2 [mil] "X2_SMD_3_2X1_5MM"
  rrect50% 30x60 smd: 1(-60,0) 2(60,0)
  silkscreen extent -35,-30 35,30, body extent -65,-30 65,30, height 150
X4-SMD-2_5X2_0X1_0MM [mm] "X4-SMD-2_5X2_0X1_0MM"
  rect 1x0.9 smd: 1(-0.813,-0.612) 2(0.813,-0.612) 3(0.813,0.612) 4(-0.813,0.612)
  silkscreen extent -1.65,-1.4 1.25,1, body extent -1.2,-1 1.2,1, height 3.81
X4-SMD-3_2X2_5X1_0MM [mil] "X4-SMD-3_2X2_5X1_0MM"
  rect 52x42 smd: 1(-45.28,-36.42) 2(45.28,-36.42) 3(45.28,36.42) 4(-45.28,36.42)
  TOP keep-out region: -19.55,58 -71.55,58 -71.55,15 -67.55,15 -19.55,15
  TOP keep-out region: -19.55,-14.84 -71.55,-14.84 -71.55,-57.84 -67.55,-57.84 -19.55,-57.84
  TOP keep-out region: 71,-14.84 19,-14.84 19,-57.84 23,-57.84 71,-57.84
  TOP keep-out region: 71,58 19,58 19,15 23,15 71,15
  silkscreen extent -90,-49 63,49, body extent -60,-50 60,50, height 150
X4_SMD_2_0X1_6MM [mil] "X4_SMD_2_0X1_6MM"
  rrect50% 35.42x31.5 smd: 1(29.53,23.62) 2(-29.53,23.62) 3(-29.53,-23.62) 4(29.53,-23.62)
  silkscreen extent -39,-32 60,50
X4_SMD_2_5X2_0MM [mil] "X4_SMD_2_5X2_0MM"
  rrect50% 39.36x35.42 smd: 1(-37.4,-32.03) 2(37.4,-32.03) 3(37.4,27.03) 4(-37.4,27.03)
  silkscreen extent -50,-67 49,37, body extent -50,-38 50,38, height 150

## Via types
v1: diameter 16/0/16/0/0/0/0/16 (per signal layer), hole 8, TOP to BOTTOM, 334 vias
v2: diameter 16/16/0/0/0/0/16/16 (per signal layer), hole 8, TOP to BOTTOM, 282 vias
v3: diameter 16/0/0/0/0/16/0/16 (per signal layer), hole 8, TOP to BOTTOM, 255 vias
v4: diameter 16/16/0/0/0/16/16/16 (per signal layer), hole 8, TOP to BOTTOM, 253 vias
v5: diameter 16, hole 8, TOP to BOTTOM, 212 vias
v6: diameter 16/16/16/0/0/16/16/16 (per signal layer), hole 8, TOP to BOTTOM, 173 vias
v7: diameter 16/0/0/16/0/0/0/16 (per signal layer), hole 8, TOP to BOTTOM, 131 vias
v8: diameter 16/0/0/0/16/0/0/16 (per signal layer), hole 8, TOP to BOTTOM, 98 vias
v9: diameter 16/16/0/16/0/0/16/16 (per signal layer), hole 8, TOP to BOTTOM, 93 vias
v10: diameter 16/0/16/0/0/16/0/16 (per signal layer), hole 8, TOP to BOTTOM, 87 vias
v11: diameter 16/16/0/16/0/16/16/16 (per signal layer), hole 8, TOP to BOTTOM, 44 vias
v12: diameter 16/16/16/16/0/16/16/16 (per signal layer), hole 8, TOP to BOTTOM, 40 vias
v13: diameter 16/16/16/0/0/0/16/16 (per signal layer), hole 8, TOP to BOTTOM, 19 vias
v14: diameter 16/0/0/16/0/16/0/16 (per signal layer), hole 8, TOP to BOTTOM, 15 vias
v15: diameter 16/0/0/0/16/16/0/16 (per signal layer), hole 8, TOP to BOTTOM, 13 vias
v16: diameter 16/0/16/0/16/0/0/16 (per signal layer), hole 8, TOP to BOTTOM, 3 vias
v17: diameter 16/0/16/16/0/0/0/16 (per signal layer), hole 8, TOP to BOTTOM, 3 vias
v18: diameter 16/16/16/16/0/0/16/16 (per signal layer), hole 8, TOP to BOTTOM, 1 vias

## Nets (pads, with @x,y where several pads share a name; then routed paths per layer and width w, separated by ;. In a path a pad name is that pad's centre, name@x,y a point inside that pad or via, vN(x,y) a via of type N, cw(c..) or ccw(c..) an arc to the next point about the centre after c; other vN are vias at no path point)
AVDD10: C295.1 C296.1 C297.1 C298.1 FB30.1 U6.3 U6.8 U6.38 | length 241.8
  TOP w10: C295.1@-11434.69,11892.56 -11434.69,11876.69 v7(-11434,11876)
  TOP w12: FB30.1@-11464.1,11925.44 -11464.1,11921.97 C295.1@-11434.69,11892.56
  BOTTOM w8: U6.38@-11434.76,11842.88 -11434.76,11875.24 v7(-11434,11876) -11434.69,11876.69 C298.1@-11434.69,11887.84 ; U6.8@-11377.67,11707.05 v7(-11351.04,11707.05) C296.1@-11331,11707.05 ; U6.3@-11377.67,11785.79 v7(-11297.79,11785.79) C297.1@-11290,11785.79
AVDD33: C108.1 C294.1 FB32.1 U6.11 U6.40 | length 233.9
  BOTTOM w8: U6.11@-11403.26,11649.96 -11403.12,11649.82 C294.1@-11331,11649.82 ; U6.40@-11403.26,11842.88 -11403.26,11848.41 -11395.26,11856.41 -11323.48,11856.41 C108.1@-11322.16,11855.09
  BOTTOM w10: v7(-11346,11641) -11339.82,11641 C294.1@-11331,11649.82 ; C108.1@-11322.16,11855.09 -11322.16,11881.45 FB32.1@-11312.61,11891
  BOTTOM w12: FB32.1@-11312.61,11891 v7(-11300,11891)
BL_EN_3V3: J8.32 R241.1 U1.H24 | length 3859.1
  TOP w4: J8.32@-12679.38,12148.55 -12679.38,12203.62 v3(-12620,12263)
  LYR3 w3.8: v10(-11886,12191) -11872.6,12191 -11867.6,12196 -11333,12196 -11300,12163 -11300,12032 -11285,12017 -11184,12017 -11124,11957 -11124,11884 -11040,11800 -11040,11667 -10931,11558 -10931,11445 -10910.2,11424.2 -10910.2,11331.46 -10921.1,11320.56 -10921.1,11266.1 -10913,11258 -10913,11147 -10936,11124 v1(-10936,11049)
  LAY6 w3.8: v3(-12620,12263) -12620,12229.13 -12569.87,12179 -11928,12179 -11916,12191 v10(-11886,12191)
  BOTTOM w3.2: U1.H24@-11779.96,11167.78 -11770.16,11157.98 -11723.98,11157.98
  BOTTOM w4: R241.1@-12653.5,12208.13 -12620,12241.63 v3(-12620,12263) ; -11723.98,11157.98 -11721.8,11155.8 -11649.92,11155.8 -11601.12,11107 -11589.1,11107 -11527.1,11045 -11015,11045 -11002,11058 -10945,11058 v1(-10936,11049)
BL_PWM_3V3: J8.33 R240.1 R244.1 | length 2671.5
  TOP w4: J8.33@-12699.06,12148.55 -12699.06,12184.99 -12695.26,12188.79 -12694.86,12188.79 v3(-12694.1,12188.03)
  LAY6 w3.8: v3(-12694.1,12188.03) -12694.1,12174.63 -12690,12170.53 -12690,12034 -12892.2,11831.8 -12892.2,11551.76 -12938,11505.96 -12938,11186.8 -12901.2,11150 -12901.2,11046.76 -12926,11021.96 -12926,10917.04 -12727.96,10719 -12350,10719 -12325,10744 -11975,10744 v3(-11964,10755)
  BOTTOM w4: v3(-12694.1,12188.03) -12694.1,12196.9 -12690.5,12200.5 R240.1@-12690.5,12208.13 ; v3(-11964,10755) -11951,10768 -11951,10841.8 -11952.8,10843.6 R244.1@-11952.8,10895.64
BOOTMODE2: R181.2 R198.1 U1.N24 | length 468.6
  TOP w4: R181.2@-11404.96,11185.26 v5(-11391.94,11185.26) R198.1@-11378.7,11185.26
  BOTTOM w3.2: U1.N24@-11779.96,11266.2 -11770.16,11276 -11721,11276
  BOTTOM w4: -11721,11276 -11658.64,11276 -11653.64,11271 -11617.64,11271 -11516.64,11170 -11407.2,11170 v5(-11391.94,11185.26)
BOOTMODE3: D66.1 R180.2 R197.1 U1.N25 | length 3377
  TOP w4: R180.2@-11404.96,11154.86 v5(-11391.94,11154.86) R197.1@-11378.7,11154.86
  LYR3 w3.8: v10(-11796,12001) -11790,12007 -11454.12,12007 -11356,11908.88 -11356,11778 -11386.56,11747.44 -11386.56,11590.56 -11363,11567 -11297.27,11567 -11250.77,11520.5 -11250.68,11520.5 -11223.6,11493.42 -11223.6,11493.33 -11187,11456.73 -11187,11341 -11177.8,11331.8 -11177.8,11309.2 -11191.7,11295.3 v1(-11191.7,11251)
  LAY6 w3.8: v3(-12751,11855) -12751,11868.4 -12756,11873.4 -12756,11906 -12705,11957 -12333.99,11957 -12254.09,12036.9 -11956.9,12036.9 -11933,12013 -11808,12013 v10(-11796,12001)
  BOTTOM w4: D66.1@-12876.58,11622.04 -12875.36,11622.04 -12848.4,11649 -12808,11649 -12772,11685 -12772,11834 v3(-12751,11855) ; U1.N25@-11760.28,11266.2 -11660.16,11266.2 -11656.96,11263 -11620.96,11263 -11513,11155.04 -11513,11143.86 -11509,11139.86 -11406.94,11139.86 v5(-11391.94,11154.86) -11391.94,11157.06 -11317,11232 -11232,11232 -11213,11251 v1(-11191.7,11251)
BOOTMODE4: R179.2 R196.1 U1.P24 | length 451.2
  TOP w4: R179.2@-11404.96,11216.26 v5(-11392,11216.26) R196.1@-11378.7,11216.26
  BOTTOM w3.2: U1.P24@-11779.96,11285.88 -11770.16,11295.68 -11727,11295.68
  BOTTOM w4: -11727,11295.68 -11655.68,11295.68 -11647,11287 -11611,11287 -11556,11232 -11491,11232 -11475.26,11216.26 v5(-11392,11216.26)
BOOTMODE5: R178.2 R195.1 U1.P22 | length 434.8
  TOP w4: R178.2@-11510.9,11216.26 v3(-11498.26,11216.26) R195.1@-11485.4,11216.26
  LAY6 w3.8: -11697,11303.66 -11660.34,11303.66 -11643.1,11320.9 -11611.9,11320.9 -11601,11310 -11601,11276 -11541.26,11216.26 v3(-11498.26,11216.26)
  LAY6 w4: v3(-11819.34,11303.66) -11697,11303.66
  BOTTOM w4: U1.P22@-11819.34,11285.88 v3(-11819.34,11303.66)
BOOTMODE7: R176.2 R193.1 U1.R23 | length 386.2
  TOP w4: R176.2@-11510.9,11185.26 v3(-11498.26,11185.26) R193.1@-11485.4,11185.26
  LAY6 w3.8: -11697,11288.68 -11624.72,11288.68 -11544.5,11208.46 ; -11544.45,11208.46 -11521.25,11185.26 v3(-11498.26,11185.26)
  LAY6 w4: v3(-11798.94,11288.68) -11697,11288.68
  BOTTOM w4: U1.R23@-11799.65,11305.57 -11799.65,11290.65 -11799,11290 -11799,11288.74 v3(-11798.94,11288.68)
BOOTMODE8: R175.2 R192.1 R271.1 U1.R24 | length 489.6
  TOP w4: R175.2@-11404.96,11246.64 v5(-11392,11246.64) R192.1@-11378.7,11246.64
  BOTTOM w3.2: U1.R24@-11779.96,11305.57 -11770.07,11315.46 -11730,11315.46
  BOTTOM w4: -11730,11315.46 -11676.54,11315.46 -11657,11335 -11605.32,11335 -11564.4,11294.08 -11564.4,11276.4 -11558,11270 -11501,11270 -11458,11227 -11424.6,11227 R271.1@-11404.96,11246.64 v5(-11392,11246.64)
BOOTMODE9: R174.2 R191.1 R270.1 U1.R25 | length 340.3
  TOP w4: R174.2@-11510.9,11246.64 v5(-11498,11246.64) R191.1@-11485.4,11246.64
  BOTTOM w4: U1.R25@-11760.28,11305.57 -11675.11,11305.57 -11653.68,11327 -11608.64,11327 -11572.4,11290.76 -11572.4,11273.08 -11561.32,11262 -11526.26,11262 R270.1@-11510.9,11246.64 v5(-11498,11246.64)
BOOTMODE10: R173.2 R190.1 R216.1 U1.T25 | length 425.8
  TOP w4: R173.2@-11404.96,11285.3 v5(-11392,11285.3) R190.1@-11378.7,11285.3
  BOTTOM w4: U1.T25@-11760.28,11325.26 -11680.12,11325.26 -11662.38,11343 -11602,11343 -11560,11301 -11420.66,11301 R216.1@-11404.96,11285.3 v5(-11392,11285.3)
BOOTMODE11: D23.1 R172.2 R189.1 R266.1 U1.R21 | length 3610.5
  TOP w4: R172.2@-11510.9,11285.3 v3(-11498,11285.3) R189.1@-11485.4,11285.3
  LYR3 w3.8: v10(-11810,12159) -11791,12178 -11443,12178 -11366,12101 -11366,12007 -11280.8,11921.8 -11280.8,11673.96 -11257,11650.16 -11257,11595.12 -11140.2,11478.32 -11140.2,11411.24 -11120.2,11391.24 -11120.2,11336.42 v10(-11110.39,11326.61)
  LAY6 w3.8: v3(-12757,11809) -12780,11832 -12780,11905 -12653,12032 -12428,12032 -12408,12052 -12009,12052 -11953,12108 -11861,12108 v10(-11810,12159) ; -11697,11312.06 -11669.94,11312.06 -11648.3,11333.7 -11591.7,11333.7 -11559,11301 -11513.7,11301 v3(-11498,11285.3) -11482.3,11301 -11136,11301 v10(-11110.39,11326.61)
  LAY6 w4: v3(-11837,11323) -11836.41,11323.59 -11817.26,11323.59 -11805.73,11312.06 -11697,11312.06
  BOTTOM w4: D23.1@-12830.66,11620.4 -12809.88,11620.4 -12757,11673.28 v3(-12757,11809) ; U1.R21@-11839.02,11305.57 -11839.02,11320.98 v3(-11837,11323) ; R266.1@-11510.9,11285.3 v3(-11498,11285.3)
BOOTMODE12: R171.2 R188.1 R267.1 U1.T22 | length 378.1
  TOP w4: R171.2@-11510.9,11316.3 v3(-11498,11316.3) R188.1@-11485.4,11316.3
  LAY6 w3.8: -11697,11325.26 -11671.74,11325.26 -11654,11343 -11575,11343 -11563,11331 -11512.7,11331 v3(-11498,11316.3)
  LAY6 w4: v3(-11800.26,11325.26) -11697,11325.26
  BOTTOM w4: U1.T22@-11819.34,11325.26 v3(-11800.26,11325.26) ; R267.1@-11510.9,11316.3 v3(-11498,11316.3)
BOOTMODE13: D49.1 R170.2 R187.1 R268.1 U1.T24 | length 3114.5
  TOP w4: R170.2@-11404.96,11315.3 v3(-11392,11315.3) R187.1@-11378.7,11315.3
  LYR3 w3.8: v10(-11797,11980) -11793,11980 -11777,11996 -11454.16,11996 -11369,11910.84 -11369,11776.04 -11396,11749.04 -11396,11579 -11373,11556 -11297.31,11556 -11295.31,11554 ; -11275.66,11534.34 -11295.31,11554 ; v10(-11191.7,11315.3) -11191.7,11329.7 -11194.8,11332.8 -11194.8,11453.49 -11231.4,11490.09 -11231.4,11490.18 -11253.92,11512.7 -11254.01,11512.7 -11295.31,11554
  LAY6 w3.8: v3(-12740,11887) -12740,11907 -12720,11927 -12352,11927 -12275.9,12003.1 -11822.1,12003.1 -11799,11980 v10(-11797,11980) ; v3(-11392,11315.3) v10(-11191.7,11315.3)
  BOTTOM w3.2: U1.T24@-11779.96,11325.26 -11770.16,11335.06 -11728.5,11335.06 -11728.09,11334.65
  BOTTOM w4: D49.1@-12830.66,11720.23 -12792.77,11720.23 -12780,11733 -12780,11847 v3(-12740,11887) ; -11728.09,11334.65 -11682.05,11334.65 -11663.5,11353.2 -11585.2,11353.2 -11563.5,11331.5 -11421.16,11331.5 R268.1@-11404.96,11315.3 v3(-11392,11315.3)
BOOTMODE14: R90.2 R91.1 R269.1 U1.U25 | length 303.2
  TOP w4: R90.2@-11510.9,11346.3 v5(-11498,11346.3) R91.1@-11485.4,11346.3
  BOTTOM w4: U1.U25@-11760.28,11344.94 -11757.2,11341.86 -11729.14,11341.86 -11709.8,11361.2 -11525.8,11361.2 R269.1@-11510.9,11346.3 v5(-11498,11346.3)
BOOTMODE15: R92.2 R93.1 R230.1 U1.U24 | length 437.2
  TOP w4: R92.2@-11404.96,11346.1 v5(-11392,11346.1) R93.1@-11378.7,11346.1
  BOTTOM w3.2: U1.U24@-11779.96,11344.94 -11770.1,11354.8 -11752.8,11354.8 -11749,11351 -11729.62,11351 -11720.82,11359.8 -11720.82,11360.18 -11711.8,11369.2
  BOTTOM w4: -11711.8,11369.2 -11428.06,11369.2 R230.1@-11404.96,11346.1 v5(-11392,11346.1)
BT_AUD_OUT: R17.1 U5.57 | length 142.7
  BOTTOM w4: R17.1@-10801.58,11975.3 -10784.7,11975.3 -10762,11998 -10762,12059 -10751,12070 U5.57@-10733.84,12070
BT_EN: R28.1 U5.41 | length 81.1
  BOTTOM w4: R28.1@-10498,11754.21 -10496.64,11755.57 U5.41@-10496.64,11834.76
BT_UART_DBG: R19.1 TP4.1 U5.43 | length 134.5
  TOP w4: v5(-10568,11739) -10555,11726 TP4.1@-10555,11713
  BOTTOM w4: v5(-10568,11739) -10568.79,11739.79 R19.1@-10568.79,11759 -10551.76,11776.03 U5.43@-10551.76,11834.76
CAM_CK_N: J17.8 U1.AD15 | length 887.4
  TOP w3.3: v5(-11862.85,11877.7) -11854,11886.55 -11854,11989.99 -11816.99,12027 -11699.01,12027 -11636.01,12090 -11636.01,12114.29 -11640.2,12118.48 J17.8@-11640.2,12150.73
  BOTTOM w3.2: -11967,11492.56 -11967,11522.71 -11946.65,11543.06 -11946.65,11560.34 ; -11966.95,11492.56 U1.AD15@-11957.13,11482.74
  BOTTOM w3.3: -11946.65,11560.34 -11946.65,11591.74 -11926.35,11612.04 -11926.35,11733.66 -11854,11806.01 -11854,11868.85 v5(-11862.85,11877.7)
CAM_CK_P: J17.9 U1.AE15 | length 884.6
  TOP w3.3: v5(-11833.85,11877.7) -11842.7,11886.55 -11842.7,11985.3 -11812.3,12015.7 -11694.32,12015.7 -11624.71,12085.31 -11624.71,12114.29 -11620.51,12118.49 J17.9@-11620.51,12150.73
  BOTTOM w3.2: U1.AE15@-11957.13,11502.42 -11953.58,11502.42 -11950,11506 -11950,11511 -11953,11514 -11956,11514 -11958,11516 -11958,11520.69 -11935.35,11543.34 -11935.35,11560.06
  BOTTOM w3.3: -11935.35,11560.06 -11935.35,11587.05 -11915.05,11607.35 -11915.05,11617 -11909.05,11623 -11909.05,11629 -11915.05,11635 -11915.05,11642 -11909.05,11648 -11909.05,11654 -11915.05,11660 -11915.05,11728.97 -11842.7,11801.32 -11842.7,11868.85 v5(-11833.85,11877.7)
CAM_D0_N: J17.2 U1.AB14 | length 885.8
  TOP w3.3: v1(-11956.35,11905.7) -11947.5,11914.55 -11947.5,12044.19 -11890.69,12101 -11759.69,12101 -11754.12,12106.57 -11754.12,12114.29 -11758.31,12118.48 J17.2@-11758.31,12150.73
  LYR3 w3: v1(-11976.82,11462.7) -11965.28,11474.24 -11965.28,11702.42 -11947,11720.7 -11947,11896.35 v1(-11956.35,11905.7)
  BOTTOM w3.3: U1.AB14@-11976.82,11443.36 v1(-11976.82,11462.7)
CAM_D0_P: J17.3 U1.AC15 | length 885.5
  TOP w3.3: v1(-11927.35,11905.7) -11936.2,11914.55 -11936.2,12039.49 -11885.99,12089.7 -11755,12089.7 -11742.82,12101.88 -11742.82,12114.29 -11738.62,12118.49 J17.3@-11738.62,12150.73
  LYR3 w3: v1(-11939.14,11463.68) -11954.98,11479.52 -11954.98,11698.15 -11936.7,11716.43 -11936.7,11896.35 v1(-11927.35,11905.7)
  BOTTOM w3.3: U1.AC15@-11957.11,11463.07 -11939.74,11463.07 v1(-11939.14,11463.68)
CAM_D1_N: J17.5 U1.AD14 | length 858.1
  TOP w3.3: v5(-11911.15,11834.7) -11902.3,11843.55 -11902.3,11992.71 -11836.01,12059 -11740.69,12059 -11695.06,12104.63 -11695.06,12114.3 -11699.25,12118.49 J17.5@-11699.25,12150.73
  BOTTOM w3.2: U1.AD14@-11976.82,11482.74 -11986.62,11492.54 -11986.7,11492.54 -11986.7,11530 -11976.82,11539.88
  BOTTOM w3.3: -11976.82,11539.88 -11976.82,11727.18 -11902,11802 -11902,11825.55 v5(-11911.15,11834.7)
CAM_D1_P: J17.6 U1.AE14 | length 852.9
  TOP w3.3: v5(-11882.15,11834.7) -11891,11843.55 -11891,11988.02 -11831.32,12047.7 -11736,12047.7 -11683.76,12099.94 -11683.76,12114.3 -11679.57,12118.49 J17.6@-11679.57,12150.73
  BOTTOM w3.2: U1.AE14@-11976.82,11502.42 -11976.82,11529.88 -11965.52,11541.18
  BOTTOM w3.3: -11965.52,11541.18 -11965.52,11605.41 -11960,11610.93 -11960,11618.61 -11965.52,11624.13 -11965.52,11631.81 -11960,11637.33 -11960,11645.01 -11965.52,11650.53 -11965.52,11658.21 -11960,11663.73 -11960,11671.41 -11965.52,11676.93 -11965.52,11684.61 -11960,11690.13 -11960,11697.81 -11965.52,11703.33 -11965.52,11722.49 -11890.7,11797.31 -11890.7,11826.15 v5(-11882.15,11834.7)
CAM_D2_N: J17.11 U1.AD13 | length 1251.3
  TOP w3.3: v5(-12037.75,11916.55) -12028.9,11925.4 -11997.31,11925.4 -11982.7,11940.01 -11982.7,12087.01 -11939.31,12130.4 -11865.31,12130.4 -11793.31,12202.4 -11640.72,12202.4 -11635.32,12197 -11627.52,12197 -11622.12,12202.4 -11614.32,12202.4 -11608.92,12197 -11601.12,12197 -11595.72,12202.4 -11581.69,12202.4 -11576.95,12197.66 -11576.95,12187.16 -11581.14,12182.97 J17.11@-11581.14,12150.73
  BOTTOM w3.2: -12001,11537.39 -12001,11537 -12003.09,11534.91 -12003.09,11514.5 -12006.3,11511.29 -12006.3,11492.54 U1.AD13@-11996.5,11482.74
  BOTTOM w3.3: v5(-12037.75,11916.55) -12028.9,11925.4 -12009.39,11925.4 -12001.3,11917.31 -12001.3,11896.32 -11954.3,11849.32 -11954.3,11812.71 -12005,11762.01 -12005,11567.7 -12001,11563.7 -12001,11537.39
CAM_D2_P: J17.12 U1.AE13 | length 1256.7
  TOP w3.3: v5(-12037.75,11945.55) -12028.9,11936.7 -12002,11936.7 -11994,11944.7 -11994,12091.7 -11944,12141.7 -11870,12141.7 -11798,12213.7 -11577,12213.7 -11565.65,12202.35 -11565.65,12187.16 -11561.46,12182.97 J17.12@-11561.46,12150.73
  BOTTOM w3.2: U1.AE13@-11996.5,11502.42 -11996.5,11530.32 -11993.8,11533.02 -11993.8,11533.68 -11993.7,11533.78 -11993.7,11536.39
  BOTTOM w3.3: v5(-12037.75,11945.55) -12028.9,11936.7 -12004.7,11936.7 -11990,11922 -11990,11901.01 -11943,11854.01 -11943,11808.02 -11993.7,11757.32 -11993.7,11572.39 -11989.7,11568.39 -11989.7,11558.01 -11993.7,11554.01 -11993.7,11536.39
CAM_D3_N: J17.14 U1.AB12 | length 1168.4
  TOP w3.3: v1(-11526.75,12096.95) -11517.9,12105.8 -11517.9,12114.29 -11522.09,12118.48 J17.14@-11522.09,12150.73
  LYR3 w3: v1(-12016.18,11464.18) -12003.3,11477.06 -12003.3,11657.1 -12031.3,11685.1 -12031.3,11868.71 -11992.3,11907.71 -11992.3,11970.4 -11914.7,12048 -11548.71,12048 -11536.65,12060.06 -11536.65,12064.3 -11537.56,12065.21 -11537.56,12069.45 -11533.31,12073.7 -11529.07,12073.7 -11528.16,12072.79 -11523.92,12072.79 -11517.4,12079.31 -11517.4,12087.6 v1(-11526.75,12096.95)
  BOTTOM w3.3: U1.AB12@-12016.18,11443.36 v1(-12016.18,11464.18)
CAM_D3_P: J17.15 U1.AC13 | length 1173
  TOP w3.3: J17.15@-11502.4,12150.73 -11502.4,12118.49 -11506.6,12114.29 -11506.6,12105.8 v1(-11497.75,12096.95)
  LYR3 w3: v1(-11996.5,11445.2) -11996.5,11457.7 -11993,11461.2 -11993,11661.37 -12021,11689.37 -12021,11864.44 -11982,11903.44 -11982,11966.13 -11910.43,12037.7 -11544.44,12037.7 -11507.1,12075.04 -11507.1,12087.6 v1(-11497.75,12096.95)
  BOTTOM w3.2: v1(-11996.5,11445.2) U1.AC13@-11996.5,11463.05
CC1: J14.A5 R129.1 | length 90.6
  TOP w4: J14.A5@-12794.21,9481.97 -12794.21,9541.11 -12783.86,9551.46 R129.1@-12783.86,9568.31
CC2: J14.B5 R128.1 | length 91.8
  TOP w4: J14.B5@-12676.1,9481.97 -12676.1,9539.62 -12663.86,9551.86 R128.1@-12663.86,9568.71
CC1352_BOOT: U1.H21 U9.21 | length 1790
  LAY6 w3.8: -11697,11204.35 -11642.47,11204.35 -11516.18,11078.06 -11436.9,11078.06 -11418.04,11059.2 -11064.8,11059.2 -11049,11075 -10911,11075 -10881.4,11045.4 -10758.6,11045.4 -10537.54,11266.46 -10537.54,11376.46 -10504,11410 v3(-10495,11410)
  LAY6 w4: v3(-11800,11205) -11799.35,11204.35 -11697,11204.35
  BOTTOM w3.2: U1.H21@-11839.02,11167.78 -11839.02,11183.67 -11825.35,11197.34 -11807.66,11197.34 v3(-11800,11205)
  BOTTOM w4: v3(-10495,11410) -10423,11410 -10402.01,11430.99 U9.21@-10377.05,11430.99
CC1352_LED1: R206.1 U9.40 | length 1727.7
  LYR3 w3.8: v1(-10041,10041) -9979,10103 -9979,10192.96 -9893.79,10278.17 -9893.79,11377.79 -9959,11443 -9959,11480 v1(-9974,11495)
  BOTTOM w4: U9.40@-10105.39,11430.99 -10080.33,11430.99 -10016.32,11495 v1(-9974,11495) ; v1(-10041,10041) -10038.5,10043.5 R206.1@-10020.42,10043.5
CC1352_LED2: R236.1 U9.41 | length 1667.6
  LYR3 w3.8: v1(-10042,10073) -10041,10073 -9991,10123 -9991,10192 -9901.59,10281.41 -9901.59,11369.59 -9976,11444 v1(-9976,11473)
  BOTTOM w4: U9.41@-10105.39,11411.31 -10088.69,11411.31 -10025,11475 -9978,11475 v1(-9976,11473) ; v1(-10042,10073) -10039.86,10075.14 R236.1@-10021.42,10075.14
CC1352_RESET_N: C20.1 D3.1 D11.1 D12.1 J11.10 R117.2 U9.35 | length 2001.2
  TOP w4: D12.1@-10331.8,11641.65 -10331,11640.85 -10331,11620 -10326,11615 -10255.37,11615 D11.1@-10228.72,11641.65 -10198.07,11611 -10130.11,11611 -10122.72,11618.39 D3.1@-10122.72,11641.65 -10064.65,11641.65 -10051,11628 -10051,11566 v1(-10062,11555)
  LYR3 w3.8: v1(-10363,10519) -10427.9,10583.9 -10427.9,10697.25 -10414.8,10710.35 -10414.8,10947.31 -10444,10976.51 -10444,11109.59 -10339.59,11214 -10339.59,11492.11 -10315.7,11516 -10168,11516 -10126,11558 -10065,11558 v1(-10062,11555)
  BOTTOM w4: U9.35@-10152.64,11517.61 -10152.64,11536.36 -10131,11558 -10088,11558 -10060.2,11585.8 C20.1@-10049,11585.8 -10043.84,11580.64 R117.2@-10043.84,11552.89 -10043.95,11553 -10060,11553 v1(-10062,11555)
CC1352_RSTN: D3.2 U1.E24 | length 2107.1
  LYR3 w3.8: v10(-10421,11250) -10423,11252 -10423,11319 -10386.6,11355.4 -10386.6,11447.6 -10417,11478 -10417,11525 -10383.71,11558.29 -10210.71,11558.29 -10186.38,11582.62 v1(-10186.38,11630)
  LAY6 w3.8: v3(-11668.5,11091.2) -11624.89,11091.2 -11613.29,11079.6 -11567.81,11079.6 -11530.87,11042.66 -11458.59,11042.66 -11422.93,11007 -10750,11007 -10747.8,11009.2 -10747.11,11009.2 -10518.31,11238 -10433,11238 v10(-10421,11250)
  BOTTOM w3.2: U1.E24@-11779.96,11108.72 -11770.08,11098.84 -11679,11098.84 -11671.36,11091.2 v3(-11668.5,11091.2)
CC1352_TCK: J11.4 U9.25 | length 1610.2
  TOP w4: J11.4@-10213.16,10479.56 -10213.16,10491.84 v1(-10213,10492)
  LYR3 w3.8: v1(-10354,11543) -10378,11543 -10393,11528 -10393,11503.99 -10367,11477.99 -10367,11229 -10382.8,11213.2 -10483,11213.2 -10510.4,11185.8 -10510.4,11004.13 -10442.2,10935.93 -10442.2,10721.72 -10455.3,10708.62 -10455.3,10660.7 -10476.4,10639.6 -10476.4,10474.44 -10440.56,10438.6 -10381.32,10438.6 -10327.92,10492 v1(-10213,10492)
  BOTTOM w4: v1(-10354,11543) -10349.49,11538.49 U9.25@-10349.49,11517.61
CC1352_TDI: J11.8 U9.27 | length 1510.3
  TOP w4: v1(-10263.16,10522.98) J11.8@-10263.16,10529.56
  LYR3 w3.8: v1(-10305,11543.39) -10351.39,11497 -10351.39,11220 -10373.79,11197.6 -10471.4,11197.6 -10492.31,11176.69 -10492.31,11008.12 -10426.6,10942.41 -10426.6,10715.24 -10439.7,10702.14 -10439.7,10647.3 -10460.8,10626.2 -10460.8,10480.92 -10434.08,10454.2 -10387.8,10454.2 -10319.02,10522.98 v1(-10263.16,10522.98)
  BOTTOM w4: U9.27@-10310.12,11517.61 -10310.12,11534.88 -10305,11540 v1(-10305,11543.39)
CC1352_TDO: J11.6 U9.26 | length 1626.4
  TOP w4: v1(-10163.16,10509.08) J11.6@-10163.16,10529.56
  LYR3 w3.8: v1(-10329.8,11543.39) -10359.2,11513.99 -10359.2,11225 -10378.79,11205.4 -10478,11205.4 -10500.11,11183.29 -10500.11,11004.88 -10434.4,10939.17 -10434.4,10718.48 -10447.5,10705.38 -10447.5,10654.5 -10468.6,10633.4 -10468.6,10477.68 -10437.32,10446.4 -10384.56,10446.4 -10321.88,10509.08 v1(-10163.16,10509.08)
  BOTTOM w4: U9.26@-10329.8,11517.61 v1(-10329.8,11543.39)
CC1352_TMS: J11.2 U9.24 | length 1425.1
  TOP w4: J11.2@-10313.16,10479.56 -10313.16,10474.16 v1(-10313,10474)
  LYR3 w3.8: v1(-10401.95,11490.05) -10374.8,11462.9 -10374.8,11236.2 -10390,11221 -10487,11221 -10518.2,11189.8 -10518.2,11000.89 -10450,10932.69 -10450,10724.96 -10463.1,10711.86 -10463.1,10665.9 -10484.2,10644.8 -10484.2,10471.2 -10443.8,10430.8 -10378.08,10430.8 -10334.88,10474 v1(-10313,10474)
  BOTTOM w4: v1(-10401.95,11490.05) U9.24@-10377.05,11490.05
CLKOUT: R98.1 U13.30 | length 36.2
  BOTTOM w4: U13.30@-10858.45,11485 -10858.45,11503.81 -10858.14,11504.12 R98.1@-10858.14,11521.04
CLKOUT0: R273.2 R275.2 | length 1340.2
  TOP w4: R273.2@-11850.05,10913.58 -11850.05,10910.05 -11826,10886 -11826,10878 v5(-11825,10877)
  BOTTOM w4: v5(-11825,10877) -11825,10905.65 -11809.55,10921.06 -11781.77,10921.06 -11774.72,10921.05 -11752,10898.32 -11752,10818 -11727,10793 -11354,10793 -11193,10954 -10903,10954 -10870.08,10986.92 R275.2@-10870.08,11109.79